# Altium PCB EM_Power_V2.PcbDoc (part 1 of 3)
Units mm, origin at the board's own origin, x right, y up, seen from the top; angles counter-clockwise.
Board outline 82 x 56 mm, 2 copper layers (Top Layer, Bottom Layer); 82 components, 61 nets, 273 pads, 201 vias.
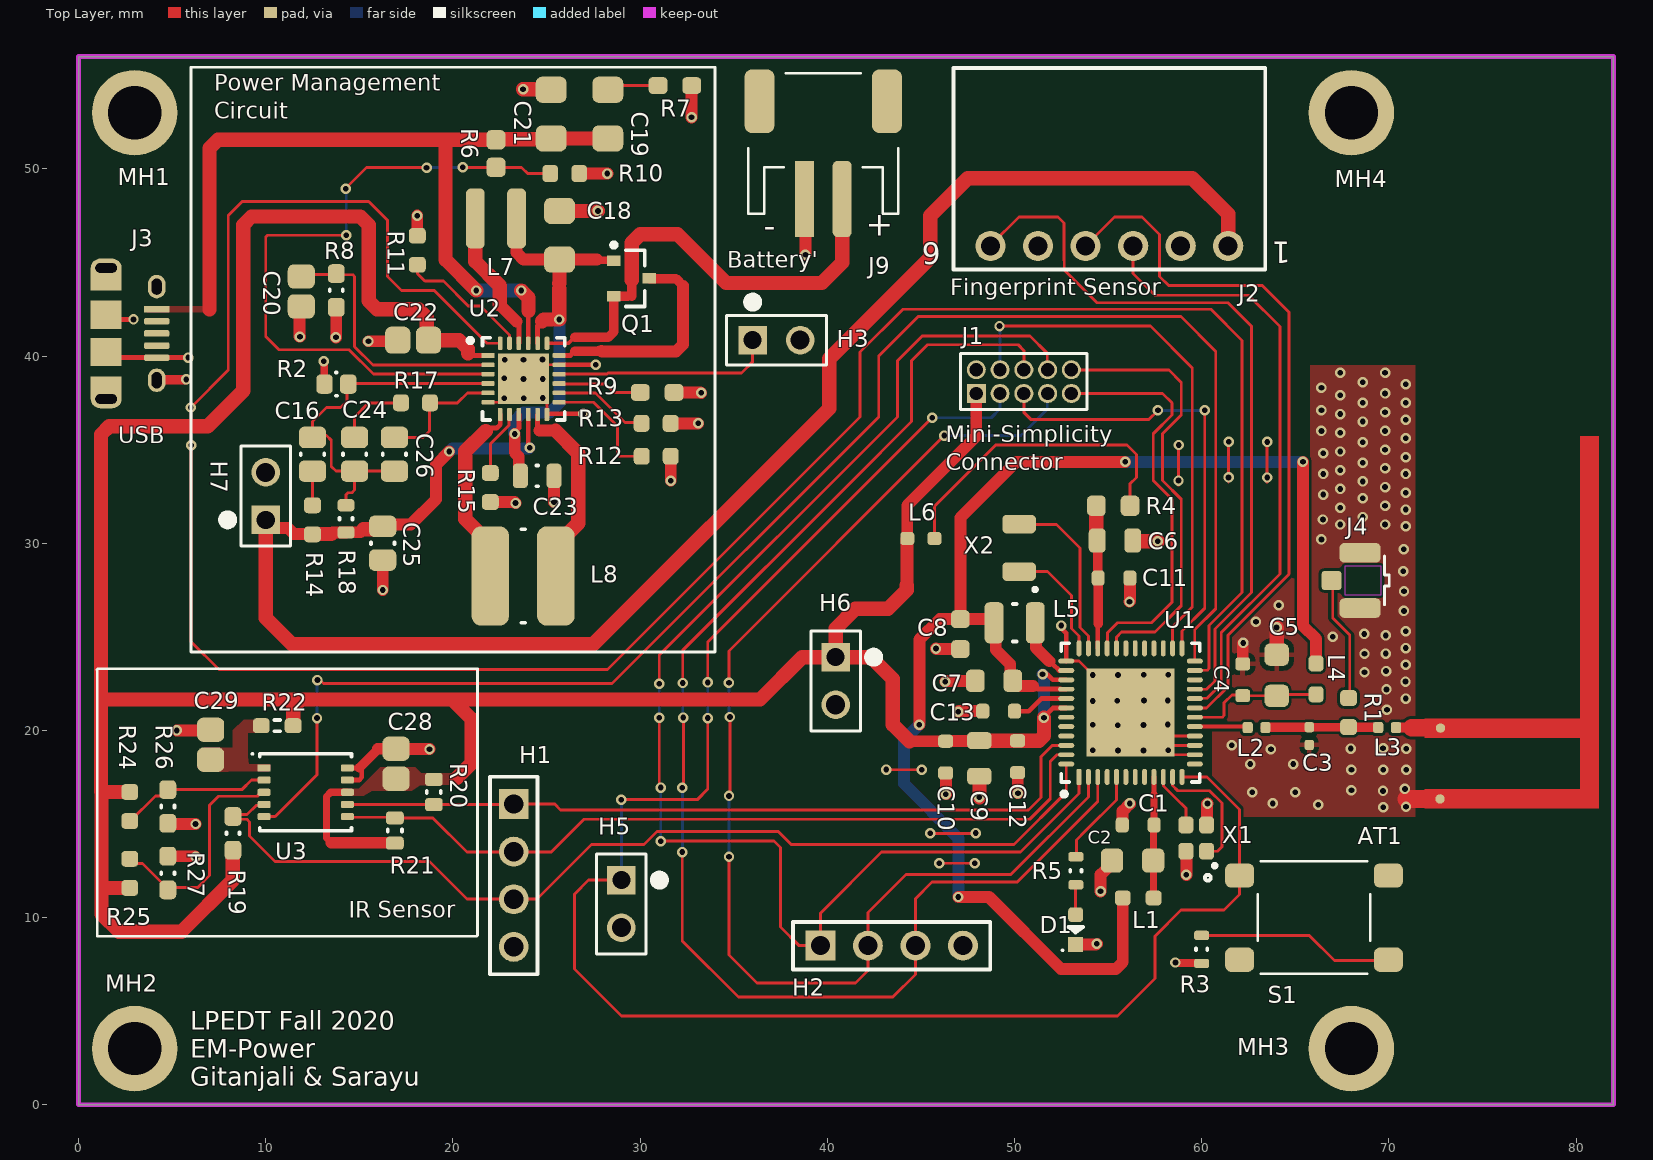
[diagram p0: Top Layer view]
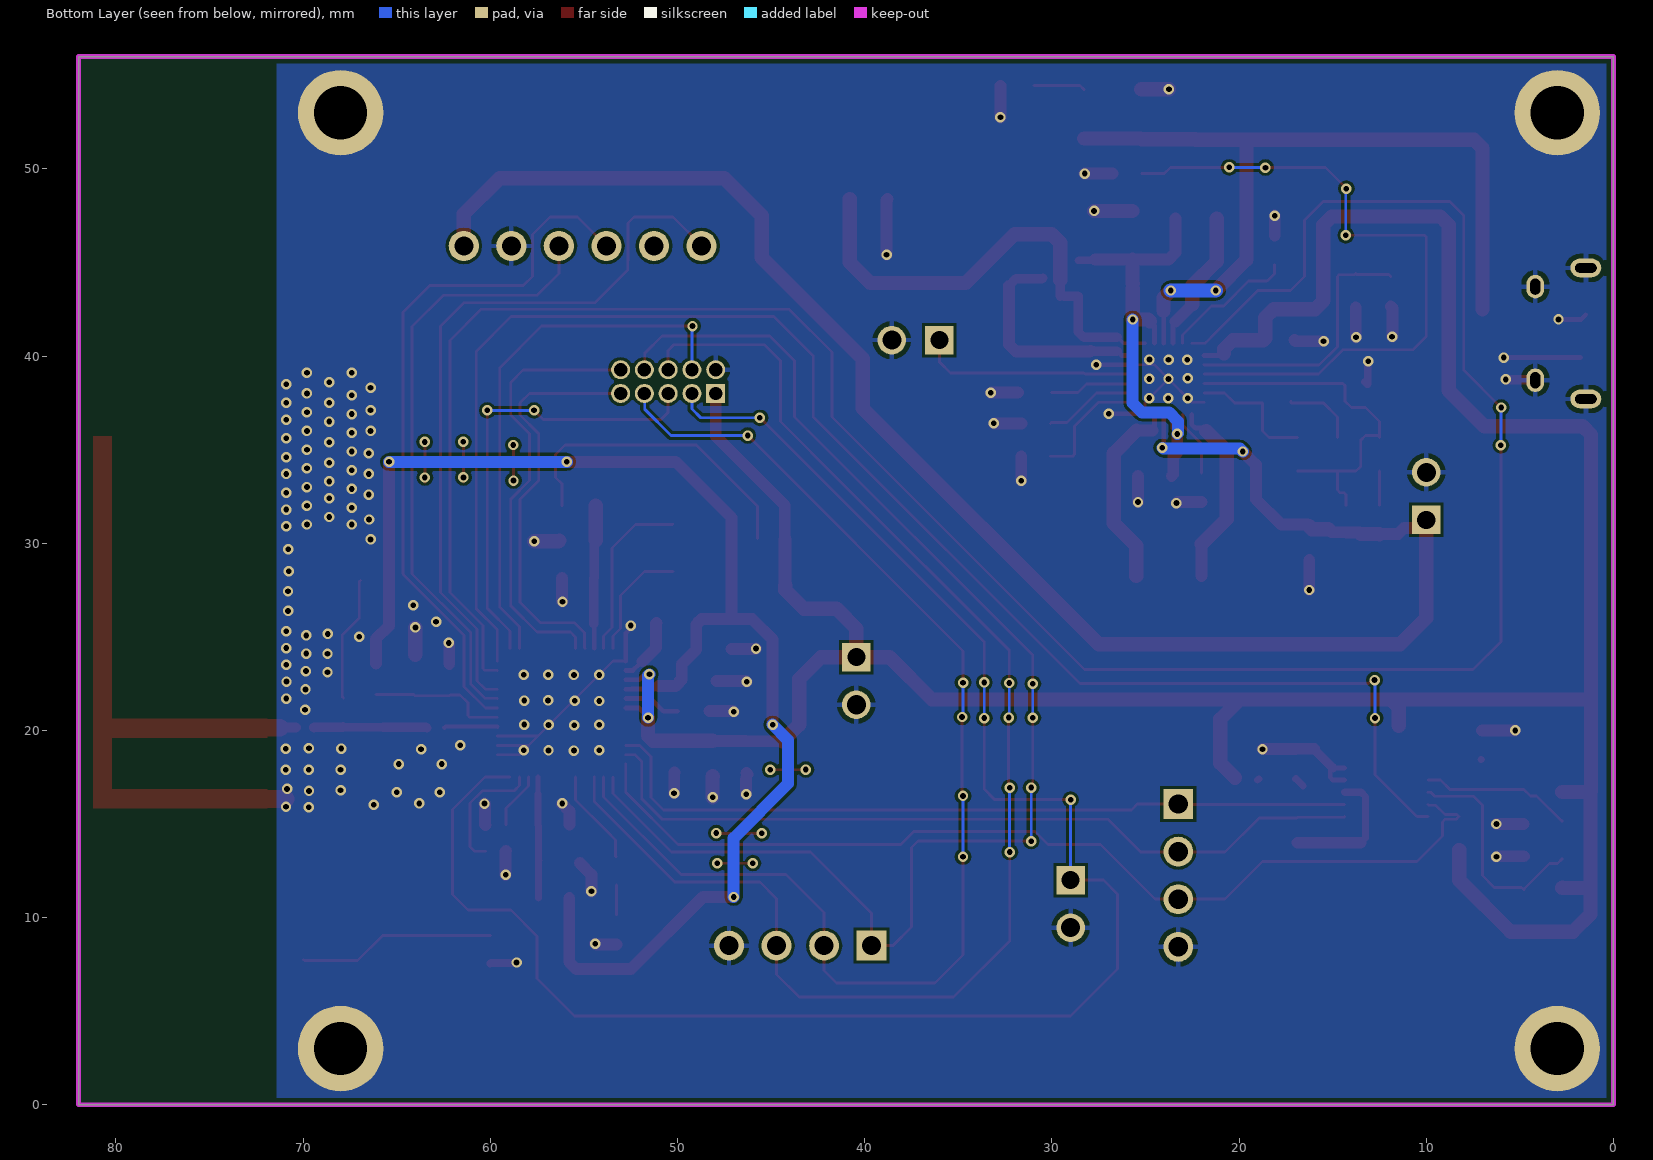
[diagram p1: Bottom Layer view, seen from below]
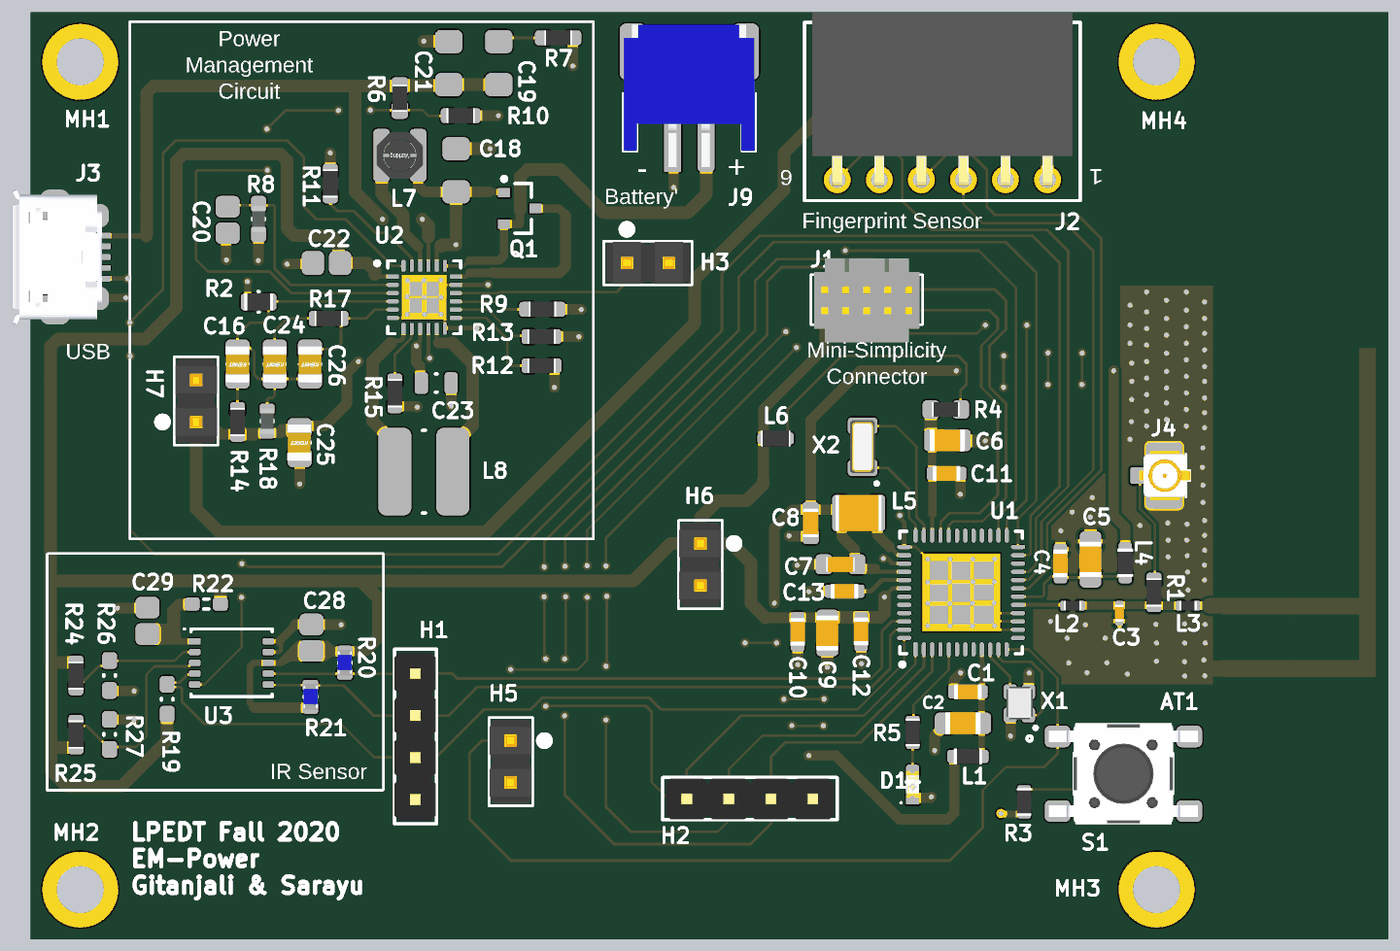
[diagram p3: 3D render of the assembled board from above, using the file's embedded part models]

## Layer stack, top to bottom
Top Solder: solder mask 0.0102, Solder Resist, Dk 3.5
Top Layer: signal copper 0.0356
Dielectric 1: dielectric 0.32, FR-4, Dk 4.8
Bottom Layer: signal copper 0.0356
Bottom Solder: solder mask 0.0102, Solder Resist, Dk 3.5

## Board outline
0,0 82,0 82,56 0,56

## Design rules (kind name [scope] priority, off if disabled: settings)
BoardOutlineClearance [All] p1: gap=0.381 ignorepadtopadclearanceinfootprint=FALSE
Clearance [All] p1: gap=0.152 ignorepadtopadclearanceinfootprint=FALSE
HoleSize [All] p1: absolutevalues=TRUE maxlimit=3.556 minlimit=0.025 maxpercent=80.000 minpercent=20.000
MinimumSolderMaskSliver [All] p1: minsoldermaskwidth=0.102
PolygonConnect GndPolygon [IsNamedPolygon('GND_L02_P005') vs HasFootprint('HOLE_#4')] p1: connectstyle=Direct reliefconductorwidth=0.254 reliefentries=4 polygonreliefangle="90 Angle" airgapwidth=0.254
PolygonConnect TopLayerPolygon [IsNamedPolygon('+3V3_IR_L01_P000') or IsNamedPolygon('+3V3_LDO_L01_P001') or IsNamedPolygon('+3V3_LDO_L01_P002') or IsNamedPolygon('VBUS_L01_P003') or IsNamedPolygon('GND_L01_P011')] p2: connectstyle=Direct reliefconductorwidth=0.254 reliefentries=4 polygonreliefangle="90 Angle" airgapwidth=0.254
PolygonConnect [All] p3: thpad.connectstyle=Relief thpad.reliefconductorwidth=0.254 thpad.reliefentries=4 thpad.polygonreliefangle="90 Angle" thpad.airgapwidth=0.254 smdpad.connectstyle=Relief smdpad.reliefconductorwidth=0.254 smdpad.reliefentries=4 smdpad.polygonreliefangle="90 Angle" smdpad.airgapwidth=0.254 via.connectstyle=Direct via.reliefconductorwidth=0.254 via.reliefentries=4 via.polygonreliefangle="90 Angle" via.airgapwidth=0.254
RoutingVias [All] p1: holewidth=0.406 width=0.66 viastyle="Through Hole" minholewidth=0.305 minwidth=0.559 maxholewidth=0.406 maxwidth=0.66
SilkToSolderMaskClearance [IsPad] p1: minsilkscreentomaskgap=0.127 clearancetoexposedcopper=TRUE
SolderMaskExpansion [All] p1: expansion=0.102 istentingtop=FALSE
Width [All] p1: maxlimit=2.54 minlimit=0.152 preferedwidth=0.152
27 further rules are at their usual default settings.

## Components (designator, comment, footprint, x,y, rotation, side; value= is the part's Value field where it differs from the comment)
AT1 "Inverted F Antenna" F-Antenna 72.748,18.232 r270 top net-tie
C1 "100pF, 6.3V, X5R" CAP_X7R_100PF 56.61,14.948 r0 top
C2 "10pF, 50V, C0G" CAP_0805_10PF 56.31,13.048 r180 top
C3 "1.5pF, 50V, C0G" CAP_0402_1.5pF 65.752,19.698 r270 top
C4 "220nF, 16V, X7R" CAP_X7R_100PF 62.196,22.704 r270 top
C5 "10pF, 50V, C0G" CAP_0805_10PF 64.01,22.948 r90 top
C6 "10µF, 6.3V, X5R" CAP_X5R_10UF 55.368,30.141 r180 top
C7 "4.7µF, 6.3V, X7R" CAP_X7R_4.7uF 48.91,22.648 r180 top
C8 "100nF, 16V, X7R" CAP_X7R_100NF 47.11,25.148 r90 top
C9 "10µF, 6.3V, X5R" CAP_X5R_10UF 48.121,18.504 r270 top
C10 "1µF, 25V, X7R" CAP_X7R_100PF 46.325,18.572 r90 top
C11 "10nF, 16V, X7R" CAP_X7R_100PF 55.318,28.141 r180 top
C12 "1µF, 25V, X7R" CAP_X7R_100PF 50.163,18.596 r90 top
C13 "1µF, 25V, X7R" CAP_X7R_100PF 49.156,21.028 r0 top
C16 "33pF, 50V, C0G" CAPC2012X09N_39P 12.5,34.75 r90 top
C18 "10µF, 25V, X5R" CAP_2012X14 25.7,46.45 r90 top
C19 "10µF, 16V, X5R" CAP_2012X14 28.275,52.923 r90 top
C20 "0.1µF, 16 V, X7R" CAPC2012X14N 11.9,43.45 r270 top
C21 "10µF, 16V, X5R" CAP_2012X14 25.251,52.923 r90 top
C22 "1µF, 10V, X5R" CAPC2012X14N_1 17.875,40.85 r180 top
C23 "2.2µF, 6.3V, X5R" CAPC2012X14N_2_2 24.5,33.6 r180 top
C24 "330pF, 50V, C0G" CAPC2012X09N_39P 14.75,34.75 r90 top
C25 "22µF, 4V, X5R" CAPC2012X14N_22 16.25,30 r90 top
C26 "0.1µF, 50V, C0G" CAPC2012X09N_39P 16.875,34.75 r90 top
C28 "1µF, 6.3V, X5R" CAPC2012X14N 16.964,18.22 r90 top
C29 "1µF, 6.3V, X5R" CAPC2012X14N 7.058,19.236 r90 top
D1 "RED LED" LED_0603_GRN_WL-SMCW 53.269,9.352 r90 top
H1 "0.1\" M Header" 4-PIN_MALE_HEADER_01-IN 23.25,12.25 r270 top
H2 "0.1\" M Header" 4-PIN_MALE_HEADER_01-IN 43.44,8.5 r0 top
H3 "0.1\" M Header" 77311-118-02LF_AMP 36.014,40.85 r180 top
H5 "0.1\" M Header" 77311-118-02LF_AMP 29,12 r90 top
H6 "0.1\" M Header" 77311-118-02LF_AMP 40.449,23.91 r90 top
H7 "0.1\" M Header" 77311-118-02LF_AMP 10,31.25 r270 top
J1 "FTSH-105-01-L-D-K" SAMTEC_FTSH-105-01-L-D-K 50.5,38.635 r0 top
J2 "PPTC061LGBN-RC" SAMTEC-SSQ-106-02-X-S-RA 55.068,51.657 r180 top
J3 "micro-USB" micro-USB 1.477,41.207 r270 top
J4 "U.FL-R-SMT(10)" U.FL_connector 68.465,28.011 r270 top
J9 "S2B-PH-SM4-TB" S2B-PH-SM4-TB 39.782,52.13 r0 top
L1 "Ferrite, 600 Ohms @ 100MHz" Ferrite_Bead_0603 56.61,11.048 r0 top
L2 "1.9nH, 220mA, 300mOhm" INDC1005X04N_1.9NH 62.932,20.149 r0 top
L3 "1.9nH, 220mA, 300mOhm" INDC1005X04N_1.9NH 69.905,20.149 r0 top
L4 "Ferrite, 600 Ohms @ 100MHz" Ferrite_Bead_0603 66.11,22.748 r270 top
L5 "4.7µH, 280mA, 143mOhms" IND_2228x1 50.01,25.748 r180 top
L6 "Ferrite, 1k @ 100MHz" Ferrite_Bead_1801x1 45,30.25 r180 top
L7 "3.3µH, 1.8A, 101mOhm" IND_2828x30 22.3,47.35 r0 top
L8 "2.2µH, 2.35A, 28mOhm" INDP4848X30N_2_2 23.75,28.25 r0 top
MH1 "#4 Hole" HOLE_#4 3,53 r0 top
MH2 "#4 Hole" HOLE_#4 3,3 r0 top
MH3 "#4 Hole" HOLE_#4 68,3 r0 top
MH4 "#4 Hole" HOLE_#4 68,53 r0 top
Q1 "SI2333DS-T1-E3" SOT95P237X112-3N 29.55,44.15 r0 top
R1 "0 Ohm" RES_0_0603 67.848,20.957 r90 top
R2 "1k" RESC1609X05N 13.775,38.5 r0 top
R3 "3.3k" RES_0603_3.3k 60,8.3 r90 top
R4 "1 Ohm" RES_0603_10k 55.275,32.001 r180 top
R5 "3.3k" RES_0603_3.3k 53.28,12.5 r270 top
R6 "100k" RESC1607X60N 22.3,50.815 r90 top
R7 "1 Ohm" RESC1508X06N 31.859,54.449 r180 top
R8 "3.01k" RESC1608X06N_3K01 13.767,43.504 r90 top
R9 "2k" RESC1508X06N 30.912,38.054 r180 top
R10 "0 Ohm" RES_0_0603 25.975,49.75 r180 top
R11 "0 Ohm" RES_0_0603 18.1,45.65 r270 top
R12 "0 Ohm" RES_0_0603 30.86,34.646 r180 top
R13 "0 Ohm" RES_0_0603 30.855,36.403 r180 top
R14 "0 Ohm" RES_0_0603 12.5,31.25 r270 top
R15 "0 Ohm" RES_0_0603 22,32.975 r90 top
R17 "0 Ohm" RES_0_0603 18,37.5 r180 top
R18 "5.23k" RES_0603_C1508X06N 14.288,31.303 r270 top
R19 "10k" RESC1508X06N_10K 8.25,14.5 r270 top
R20 "4.7k" RESC1608X06N_4_7 18.981,16.709 r90 top
R21 "4.7k" RESC1608X06N_4_7 16.9,14.65 r270 top
R22 "330 Ohm" RESC1608X06N_330 10.614,20.252 r0 top
R24 "0 Ohm" RES_0_0603 2.74,15.934 r90 top
R25 "0 Ohm" RES_0_0603 2.74,12.365 r270 top
R26 "10k" RESC1508X06N_10K 4.772,15.934 r90 top
R27 "10k" RESC1508X06N_10K 4.772,12.378 r270 top
S1 "TACTILE SWITCH" SW_PTS645SK50SMTR92LFS 66,10 r0 top
U1 "EFR32BG12P433F1024GM48-CR" QFN50P700X700X90_HS-49N 56.2,20.95 r90 top
U2 "LTC3566EUF#PBF" QFN50P400X400X80_HS 23.775,38.781 r0 top
U3 "AK9753AE" SON65P460X114-10N 12.138,16.696 r0 top
X1 "38.4MHz" OSCSC220P320X250X70-4N 59.71,14.248 r90 top
X2 "32.768kHz" XTAL320X150X90 50.25,29.75 r90 top

## Footprints (in the part's own frame and the unit in brackets; to place one, negate y for a bottom-side part, rotate by r counter-clockwise, add the part's x,y. Pads: shape width x height; smd on the part's side, far side on the other; paste and mask are expansions set on the pad)
4-PIN_MALE_HEADER_01-IN [mm] "Assembly .025\" [.64] SQ Post Terminal Strip, 1x4 Pins, Vertical, 2.54mm Pitch, Male"
  rect 1.6x1.6 hole 1.02: 1(-3.81,0)
  round 1.6 hole 1.02: 2(-1.27,0) 3(1.27,0) 4(3.81,0)
  silkscreen extent -5.27,-1.27 5.27,1.27, body extent -5.08,-1.27 5.08,1.22, height 8.54
77311-118-02LF_AMP [mil]
  rect 60x60 hole 38 mask+0: 1(0,0)
  round 60 hole 40 mask+0: 2(-100,0)
  silkscreen extent -155,-90 55,52, body extent -150,-50 50,50, height 350
CAP_0402_1.5pF [mm] "CAP CER 1.5PF 50V C0G/NP0 0402"
  rrect50% 0.55x0.5 smd: 1(-0.475,0) 2(0.475,0)
  body extent -0.53,-0.27 0.53,0.28, height 0.55
CAP_0805_10PF [mm] "CAP CER 10PF 50V C0G/NP0 0805"
  rrect50% 1.2x1.3 smd: 1(-1.1,0) 2(1.1,0)
  body extent -1.07,-0.67 1.08,0.67, height 0.7
CAP_2012X14 [mm] "Chip Capacitor, 2-Leads, Body 2.00x1.25mm, IPC Medium Density"
  rrect50% 1.4x1.65 smd: 1(-1.3,0) 2(1.3,0)
  body extent -1.07,-0.7 1.07,0.7, height 1.4
CAP_X5R_10UF [mm] "CAP CER 10UF 6.3V X5R 0805"
  rrect50% 0.9x1.3 smd: 1(-0.95,0) 2(0.95,0)
  body extent -1.07,-0.67 1.08,0.67, height 1.35
CAP_X7R_4.7uF [mm] "CAP CER 4.7UF 6.3V X7R 0603"
  rrect50% 1x1.2 smd: 1(-1,0) 2(1,0)
  body extent -0.87,-0.48 0.88,0.48, height 0.95
CAP_X7R_100NF [mm] "CAP CER 0.1UF 16V X7R 0603"
  rrect50% 0.95x1 smd: 1(-0.8,0) 2(0.8,0)
  body extent -0.87,-0.48 0.88,0.48, height 0.95
CAP_X7R_100PF [mm] "CAP CER 100PF 16V X7R 0603"
  rrect50% 0.7x0.8 smd: 1(-0.85,0) 2(0.85,0)
  body extent -0.85,-0.45 0.85,0.45, height 0.87
CAPC2012X09N_39P [mm] "39pF, Chip Capacitor, 2-Leads, Body 2.00x1.25mm, IPC Medium Density"
  rrect50% 1.15x1.45 smd: 1(-0.9,0) 2(0.9,0)
  silkscreen extent -0.05,-0.63 0.05,0.63, body extent -1.13,-0.73 1.07,0.73, height 0.88
CAPC2012X14N [mm] "Chip Capacitor, 2-Leads, Body 2.00x1.25mm, IPC Medium Density"
  rrect50% 1.3x1.45 smd mask+0.09: 1(-0.8,0) 2(0.8,0)
  body extent -1.1,-0.72 1.1,0.72, height 1.45
CAPC2012X14N_1 [mm] "Chip Capacitor, 2-Leads, Body 2.01x1.25mm, IPC Medium Density"
  rrect50% 1.35x1.45 smd mask+0.08: 1(-0.825,0) 2(0.825,0)
  body extent -1.1,-0.72 1.11,0.72, height 1.4
CAPC2012X14N_2_2 [mm] "2.2uF, Chip Capacitor, 2-Leads, Body 2.00x1.25mm, IPC Medium Density"
  rrect50% 0.8x1.3 smd: 1(-0.9,0) 2(0.9,0)
  silkscreen extent -0.05,-0.55 0.05,0.55, body extent -1.08,-0.67 1.07,0.68, height 1.35
CAPC2012X14N_22 [mm] "22uF, Chip Capacitor, 2-Leads, Body 2.00x1.25mm, IPC Medium Density"
  rrect50% 1.15x1.45 smd: 1(-0.9,0) 2(0.9,0)
  silkscreen extent -0.05,-0.63 0.05,0.63, body extent -1.1,-0.7 1.1,0.75, height 1.4
F-Antenna [mm]
  round 0.5 smd paste-2 mask-2: 1(1.892,-0.012) 2(-1.891,0.013)
  Top Layer region: 2.392,-0.818 2.392,8.478 -17.471,8.478 -17.471,7.488 -2.399,7.488 -2.399,-0.818 -1.383,-0.818 -1.383,7.488 1.376,7.488 1.376,-0.818
Ferrite_Bead_0603 [mm] "FERRITE BEAD 600 OHM 0603 1LN"
  rrect50% 0.85x0.8 smd: 1(-0.825,0) 2(0.825,0)
  body extent -0.87,-0.48 0.88,0.48, height 0.95
Ferrite_Bead_1801x1 [mm] "FERRITE BEAD 1 KOHM 0603 1LN"
  rrect50% 0.75x0.7 smd: 1(-0.725,0) 2(0.725,0)
  body extent -0.9,-0.5 0.9,0.5, height 1
HOLE_#4 [mil]
  round 180 hole 112: 1(0,0)
IND_2228x1 [mm] "Shielded Multilayer Inductor 143mOhm Max 1008 (2520 Metric)"
  rrect50% 1x2.2 smd: 1(-1.1,0) 2(1.1,0)
  silkscreen extent -0.1,-1 0.1,1, body extent -1.4,-1.1 1.4,1.1, height 1
IND_2828x30 [mm] "Precision Wire Wound Inductor, 2-Leads, Body 2.80x2.80mm, IPC Medium Density"
  rrect50% 1x3.2 smd: 1(-1.1,0) 2(1.1,0)
  body extent -1.4,-1.4 1.4,1.4, height 2.8
INDC1005X04N_1.9NH [mm] "Chip Inductor, 2-Leads, Body 1.00x0.50mm, IPC Medium Density"
  rrect50% 0.55x0.6 smd: 1(-0.475,0) 2(0.475,0)
  body extent -0.55,-0.3 0.55,0.3, height 0.45
INDP4848X30N_2_2 [mm] "2.2uH, Precision Wire Wound Inductor, 2-Leads, Body 4.80x4.80mm, IPC Medium Density"
  rrect50% 2x5.3 smd: 1(-1.75,0) 2(1.75,0)
  silkscreen extent -0.1,-2.5 0.1,2.5, body extent -2.5,-2.5 2.5,2.5, height 3
LED_0603_GRN_WL-SMCW [mm] "SODFL, 2-Leads, Body 0.80x1.80mm, IPC Medium Density"
  rrect50% 0.8x0.8 smd: 1(0.8,0)
  rect 0.8x0.8 smd: 2(-0.8,0)
  silkscreen extent -1.15,-0.4 0.15,0.75, body extent -0.8,-0.4 0.8,0.4, height 0.71
micro-USB [mm] "microUSB paste-in-pad"
  rect 0.35x1.35 smd mask+0.05: 1(-1.3,2.7)
  rrect50% 0.35x1.35 smd mask+0.05: 2(-0.65,2.7) 3(0,2.7) 4(0.65,2.7) 5(1.3,2.7)
  oval 1.25x0.95 hole 0.55 slot 0.85 at 0 deg mask+0.076: S1(-2.5,2.7) S2(2.5,2.7)
  rrect100% 1x1.65 hole 0.5 slot 1.15 at 90 deg mask+0.076: S3(-3.5,0) S6(3.5,0)
  rect 1.2x1.65 smd mask+0.076: S3(-2.896,0) S6(2.896,0)
  rect 1.5x1.65 smd mask+0.076: S4(-1,0) S5(1,0)
  body extent -4.1,-2.58 4.1,2.85, height 2.71
OSCSC220P320X250X70-4N [mm]
  rrect50% 0.9x0.8 smd mask+0.089: 1(-0.7,-0.55) 2(0.7,-0.55) 3(0.7,0.55) 4(-0.7,0.55)
  silkscreen extent -1.57,-1.08 -1.37,-0.88, body extent -0.98,-0.82 1.02,0.78, height 0.45
QFN50P400X400X80_HS [mm] "QFN, 24-Leads, Body 4.00x4.00mm, Pitch 0.50mm, Thermal Pad 2.70x2.70mm, IPC Medium Density"
  rect 0.7x0.25 smd mask+0.04: 1(-1.9,1.25)
  rrect50% 0.7x0.25 smd mask+0.04: 2(-1.9,0.75) 3(-1.9,0.25) 4(-1.9,-0.25) 5(-1.9,-0.75) 6(-1.9,-1.25) 13(1.9,-1.25) 14(1.9,-0.75) 15(1.9,-0.25) 16(1.9,0.25) 17(1.9,0.75) 18(1.9,1.25)
  rrect50% 0.25x0.7 smd mask+0.04: 7(-1.25,-1.9) 8(-0.75,-1.9) 9(-0.25,-1.9) 10(0.25,-1.9) 11(0.75,-1.9) 12(1.25,-1.9) 19(1.25,1.9) 20(0.75,1.9) 21(0.25,1.9) 22(-0.25,1.9) 23(-0.75,1.9) 24(-1.25,1.9)
  rect 2.7x2.7 smd paste-2 mask+0.04: 25(-0.004,-0.004)
  silkscreen extent -2.97,-2.2 2.2,2.2, body extent -2.05,-2.05 2.05,2.05, height 0.8
QFN50P700X700X90_HS-49N [mm] "QFN, 48-Leads, Body 7.00x7.00mm, Pitch 0.50mm, Thermal Pad 4.70x4.70mm, IPC Medium Density"
  rect 4.7x4.7 smd paste-2.54: 0(0,0)
  rrect50% 0.86x0.26 smd mask+0.045: 1(-3.435,2.75)
  oval 0.86x0.26 smd mask+0.045: 2(-3.435,2.25) 3(-3.435,1.75) 4(-3.435,1.25) 5(-3.435,0.75) 6(-3.435,0.25) 7(-3.435,-0.25) 8(-3.435,-0.75) 9(-3.435,-1.25) 10(-3.435,-1.75) 11(-3.435,-2.25) 12(-3.435,-2.75) 25(3.435,-2.75) 26(3.435,-2.25) 27(3.435,-1.75) 28(3.435,-1.25) 29(3.435,-0.75) 30(3.435,-0.25) 31(3.435,0.25) 32(3.435,0.75) 33(3.435,1.25) 34(3.435,1.75) 35(3.435,2.25) 36(3.435,2.75)
  oval 0.26x0.86 smd mask+0.045: 13(-2.75,-3.435) 14(-2.25,-3.435) 15(-1.75,-3.435) 16(-1.25,-3.435) 17(-0.75,-3.435) 18(-0.25,-3.435) 19(0.25,-3.435) 20(0.75,-3.435) 21(1.25,-3.435) 22(1.75,-3.435) 23(2.25,-3.435) 24(2.75,-3.435) 37(2.75,3.435) 38(2.25,3.435) 39(1.75,3.435) 40(1.25,3.435) 41(0.75,3.435) 42(0.25,3.435) 43(-0.25,3.435) 44(-0.75,3.435) 45(-1.25,3.435) 46(-1.75,3.435) 47(-2.25,3.435) 48(-2.75,3.435)
  silkscreen extent -4.47,-3.7 3.7,3.7, body extent -3.55,-3.55 3.55,3.55, height 0.9
RES_0_0603 [mm] "RES SMD 0 OHM JUMPER 1/10W 0603"
  rrect50% 0.85x0.9 smd: 1(-0.775,0) 2(0.775,0)
  body extent -0.85,-0.45 0.85,0.45, height 0.55
RES_0603_3.3k [mm] "RES SMD 3.3 KOHM 1% 0.3W 0603"
  rrect50% 0.5x0.8 smd: 1(-0.75,0) 2(0.75,0)
  silkscreen extent -0.05,-0.3 0.05,0.3, body extent -0.85,-0.45 0.85,0.45, height 0.55
RES_0603_10k [mm] "RES SMD 10K OHM 1% 1/16W 0603"
  rrect50% 1x1.1 smd: 1(-0.9,0) 2(0.9,0)
  body extent -0.82,-0.45 0.83,0.45, height 0.55
RES_0603_C1508X06N [mm] "5.23k ohm, Chip Resistor, 2-Leads, Body 1.55x0.80mm, IPC Medium Density"
  rrect50% 0.65x0.9 smd: 1(-0.725,0) 2(0.725,0)
  silkscreen extent -0.05,-0.35 0.05,0.35, body extent -0.78,-0.4 0.78,0.4, height 0.44
RESC1508X06N [mm] "2k ohm, Chip Resistor, 2-Leads, Body 1.55x0.80mm, IPC Medium Density"
  rrect50% 1x0.9 smd: 1(-0.9,0) 2(0.9,0)
  body extent -0.82,-0.45 0.82,0.45, height 0.55
RESC1508X06N_10K [mm] "10k ohm, Chip Resistor, 2-Leads, Body 1.55x0.80mm, IPC Medium Density"
  rrect50% 1x0.9 smd: 1(-0.9,0) 2(0.9,0)
  silkscreen extent -0.05,-0.35 0.05,0.35, body extent -0.82,-0.45 0.82,0.45, height 0.55
RESC1607X60N [mm]
  rrect50% 1.04x1.02 smd: 1(-0.735,0) 2(0.735,0)
  body extent -0.82,-0.45 0.83,0.45, height 0.55
RESC1608X06N_3K01 [mm] "3.01k, Chip Resistor, 2-Leads, Body 1.55x0.80mm, IPC Medium Density"
  rrect50% 1x0.9 smd: 1(-0.9,0) 2(0.9,0)
  silkscreen extent -0.05,-0.35 0.05,0.35, body extent -0.78,-0.4 0.78,0.4, height 0.44
RESC1608X06N_4_7 [mm] "4.7k ohm, Chip Resistor, 2-Leads, Body 1.55x0.85mm, IPC Medium Density"
  rrect50% 0.7x0.95 smd: 1(-0.675,0) 2(0.675,0)
  silkscreen extent -0.05,-0.38 0.05,0.38, body extent -0.78,-0.42 0.78,0.43, height 0.45
RESC1608X06N_330 [mm] "330 ohm, Chip Resistor, 2-Leads, Body 1.60x0.80mm, IPC Medium Density"
  rrect50% 0.9x0.8 smd: 1(-0.85,0) 2(0.85,0)
  silkscreen extent -0.15,-0.3 0.15,0.3, body extent -0.85,-0.45 0.85,0.45, height 0.55
RESC1609X05N [mm] "1k ohm, Chip Resistor, 2-Leads, Body 1.60x0.90mm, IPC Medium Density"
  rrect50% 0.88x1.03 smd: 1(-0.635,0) 2(0.635,0)
  silkscreen extent -0.04,-0.63 0.04,0.63, body extent -0.87,-0.52 0.87,0.52, height 0.51
S2B-PH-SM4-TB [mil]
  rect 40x160 smd: 1(-39.44,-147.2)
  rrect50% 40x160 smd: 2(39.93,-147.2)
  rrect50% 63x134 smd: NC1(-133.93,58.46) NC2(133.93,58.46)
  silkscreen extent -158,-179 158,117, body extent -156,-216 155,123, height 220
SAMTEC-SSQ-106-02-X-S-RA [mm]
  round 1.62 / inner round 1.524 / far side round 1.62 hole 1.02: 1(-6.35,5.778) 2(-3.81,5.778) 3(-1.27,5.778) 4(1.27,5.778) 5(3.81,5.778) 6(6.35,5.778)
  silkscreen extent -8.32,-3.72 8.32,7.04, body extent -7.87,-4.32 7.87,6.14, height 2.57
SAMTEC_FTSH-105-01-L-D-K [mil]
  rect 40x40 hole 28 mask+2: 1(-100,-25)
  round 40 hole 28 mask+2: 2(-100,25) 3(-50,-25) 4(-50,25) 5(0,-25) 6(0,25) 7(50,-25) 8(50,25) 9(100,-25) 10(100,25)
  silkscreen extent -133,-59 133,59, body extent -125,-102 125,98, height 225
SON65P460X114-10N [mm] "SON, 10-Leads, Body 3.80x4.60mm, Pitch 0.65mm, IPC Medium Density"
  rect 0.7x0.38 smd mask+0.08: 1(-2.225,1.3)
  rrect50% 0.7x0.38 smd mask+0.08: 2(-2.225,0.65) 3(-2.225,0) 4(-2.225,-0.65) 5(-2.225,-1.3) 6(2.225,-1.3) 7(2.225,-0.65) 8(2.225,0) 9(2.225,0.65) 10(2.225,1.3)
  silkscreen extent -2.9,-2.05 2.45,2.1, body extent -2.3,-1.9 2.3,1.9, height 1.14
SOT95P237X112-3N [mm] "SOT23, 3-Leads, Body 2.92x2.37mm, Pitch 0.95mm, IPC Medium Density"
  rect 0.724x0.559 smd: 1(-0.95,0.95) 2(-0.95,-0.95) 3(0.95,0)
  silkscreen extent -1.07,-1.5 0.7,1.9, body extent -0.7,-1.52 0.7,1.52, height 1.12
SW_PTS645SK50SMTR92LFS [mm]
  rrect50% 1.55x1.3 smd: 1(-3.975,2.25) 2(3.975,2.25) 3(-3.975,-2.25) 4(3.975,-2.25)
  silkscreen extent -5.83,-3 3,3, body extent -4.5,-3 4.5,3, height 5.1
U.FL_connector [mm]
  rrect25% 1x1.05 smd: FEED(0,-1.525)
  rrect50% 1.05x2.2 smd: G1(-1.475,0) G2(1.475,0)
  Top Layer keep-out region: -0.762,-0.819 0.762,-0.819 0.762,1.137 -0.762,1.137
  silkscreen extent -1.3,1.3 1.3,1.55, body extent -1.5,-1.51 1.5,1.59, height 1.25
XTAL320X150X90 [mm]
  rrect50% 1x1.8 smd: 1(-1.269,0) 2(1.269,0)
  silkscreen extent -2.32,-0.95 -2.12,-0.75, body extent -1.6,-0.75 1.6,0.75, height 0.8

## Part data
AT1: library part F_ANTENNA
C1: library part 885012206028, "100 pF, 16 V, 0603 [1608 Metrické], ± 10%, X7R", Capacitance=100pF, Case Code (Imperial)=0603, Case Code (Metric)=1608, Manufacturer="Wurth Electronics", Max Operating Temperature=125°C, Min Operating Temperature=-55°C, Supplier Part Number 1=732-7947-1-ND, Tolerance=10%, Voltage Rating=16V, Case/Package=0603, Category="Ceramic Capacitors", ComponentLink1Description=http://www.farnell.com/datasheets/2546812.pdf?src-supplier=Farnell, ComponentLink1URL=http://www.farnell.com/datasheets/2546812.pdf?src-supplier=Farnell, ComponentLink2Description=http://katalog.we-online.de/pbs/datasheet/885012206028.pdf?src-supplier=Digi-Key, ComponentLink2URL=http://katalog.we-online.de/pbs/datasheet/885012206028.pdf?src-supplier=Digi-Key, ComponentLink3Description=https://katalog.we-online.de/pbs/datasheet/885012206028.pdf?src-supplier=Digi-Key, ComponentLink3URL=https://katalog.we-online.de/pbs/datasheet/885012206028.pdf?src-supplier=Digi-Key, Length=0.063inch, Manufacturer Part Number=885012206028, Mount="Surface Mount", Packaging="Tape and Reel", Pricing 1="1=0.10000, 10=0.02100, 100=0.01920, 500=0.01698 (USD)", RoHS=Yes, Stock 1=1513, Supplier 1=Digi-Key, Thickness=0.034inch, Width=0.031inch
C2 C5: library part VJ0805A100JXACW1BC, "CERAMIC CAP 10PF 50V, C0G, 5%, 0805", Capacitance=10pF, Case Code (Imperial)=0805, Case Code (Metric)=2012, Dielectric=C0G, Dielectric Material=Tantalum, Manufacturer=Vishay, Max Operating Temperature=125°C, Min Operating Temperature=-55°C, Package Quantity=4000, Supplier Part Number 1=720-1625-1-ND, Temperature Coefficient=0ppm/°C, Tolerance=5%, Voltage Rating=50V, Case/Package=0805, Category="Ceramic Capacitors", ComponentLink1Description=https://datasheet.ciiva.com/8063/1760306-8063331.pdf?src-supplier=Element14, ComponentLink1URL=https://datasheet.ciiva.com/8063/1760306-8063331.pdf?src-supplier=Element14, ComponentLink2Description=https://datasheet.ciiva.com/176/vjw1bcbascomseries-176727.pdf?src-supplier=Digi-Key, ComponentLink2URL=https://datasheet.ciiva.com/176/vjw1bcbascomseries-176727.pdf?src-supplier=Digi-Key, ComponentLink3Description=https://datasheet.ciiva.com/11486/vjw1bcbascomseries-11486214.pdf?src-supplier=Avnet, ComponentLink3URL=https://datasheet.ciiva.com/11486/vjw1bcbascomseries-11486214.pdf?src-supplier=Avnet, ComponentLink4Description=https://datasheet.ciiva.com/16201/vjw1bcbascomseries-16201004.pdf?src-supplier=Future+Electronics, ComponentLink4URL=https://datasheet.ciiva.com/16201/vjw1bcbascomseries-16201004.pdf?src-supplier=Future+Electronics, Depth=1.25mm, Height=1.45mm, Lead Free="Lead Free", Length=2mm, Manufacturer Part Number=VJ0805A100JXACW1BC, Mount="Surface Mount", Number of Pins=2, Packaging="Tape and Reel", Pricing 1="1=0.20000, 10=0.14000, 50=0.07940, 100=0.06580, 500=0.04614, 1000=0.03819 (USD)", REACH SVHC=Unknown, RoHS=Yes, Stock 1=4065, Supplier 1=Digi-Key, Termination=SMD/SMT, Thickness=0.03inch, Voltage Rating (DC)=50V, Width=0.049inch
C3: library part GJM1555C1H1R5WB01D, "Cap Ceramic 1.5pF 50V C0G 0.05pF SMD 0402 125C Paper T/R", Capacitance=1.5pF, Case Code (Imperial)=0402, Case Code (Metric)=1005, Dielectric=C0G, Manufacturer=Murata, Max Operating Temperature=125°C, Min Operating Temperature=-55°C, Package Quantity=10000, Supplier Part Number 1=490-11199-1-ND, Voltage Rating=50V, Case/Package=0402, Category="Ceramic Capacitors", ComponentLink1Description=https://datasheet.ciiva.com/18183/getdatasheetpartid-312921-18183825.pdf?src-supplier=Verical, ComponentLink1URL=https://datasheet.ciiva.com/18183/getdatasheetpartid-312921-18183825.pdf?src-supplier=Verical, Depth=0.5mm, Height=0.5mm, Lead Free="Lead Free", Length=1mm, Manufacturer Part Number=GJM1555C1H1R5WB01D, Mount="Surface Mount", Packaging="Tape and Reel", Pricing 1="1=0.24000, 10=0.16200, 50=0.10800, 100=0.09180, 500=0.06480, 1000=0.05670, 2500=0.05400, 5000=0.04995 (USD)", Radiation Hardening=No, RoHS=Yes, Stock 1=83250, Supplier 1=Digi-Key, Termination=SMD/SMT, Thickness=0.022inch, Voltage Rating (DC)=50V, Width=0.02inch
C4: library part 885012206048, "220nF/0.22UF, 16V, X7R, 10%, 0603, CERAMIC CAPACITOR ; Product Range:CC Series; Capacitance:0.22 F; Capacitance Tolerance: 10%; Dielectric Characteristic:X7R; Voltage Rating:16V; Ceramic Capacitor Case:0603 ; Packaging:Cut Tape;RoHS Compliant: Yes", Capacitance=220nF, Case Code (Imperial)=0805, Case Code (Metric)=2012, Dielectric=X7R, Dielectric Material=Ceramic, Insulation Resistance=100GR, Manufacturer=Yageo, Manufacturer Part Number=CC0805KRX7R7BB224, Max Operating Temperature=125°C, Min Operating Temperature=-55°C, Supplier Part Number 1=732-7967-1-ND, Tolerance=10%, Voltage=16V, Case/Package=0805, Category="Ceramic Capacitors", ComponentLink1Description=https://datasheet.ciiva.com/8034/1489800-8034021.pdf?src-supplier=Element14, ComponentLink1URL=https://datasheet.ciiva.com/8034/1489800-8034021.pdf?src-supplier=Element14, ComponentLink2Description=https://datasheet.ciiva.com/8034/1489800-8034022.pdf?src-supplier=Element14, ComponentLink2URL=https://datasheet.ciiva.com/8034/1489800-8034022.pdf?src-supplier=Element14, ComponentLink3Description=https://datasheet.ciiva.com/15189/getdatasheetpartid-315919-15189222.pdf?src-supplier=Verical, ComponentLink3URL=https://datasheet.ciiva.com/15189/getdatasheetpartid-315919-15189222.pdf?src-supplier=Verical, ComponentLink4Description=https://datasheet.ciiva.com/16624/upy-gphc-x7r-6-3v-to-50v-8-16624663.pdf?src-supplier=Avnet+Europe, ComponentLink4URL=https://datasheet.ciiva.com/16624/upy-gphc-x7r-6-3v-to-50v-8-16624663.pdf?src-supplier=Avnet+Europe, ComponentLink5Description=https://datasheet.ciiva.com/7978/1489800-7978206.pdf?src-supplier=Element14, ComponentLink5URL=https://datasheet.ciiva.com/7978/1489800-7978206.pdf?src-supplier=Element14, Depth=1.25mm, Halogen Free="Halogen Free", Height=0.85mm, Lead Free="Lead Free", Length=2mm, Material=Ceramic, Mount="Surface Mount", Number of Pins=2, Packaging="Tape and Reel", Pricing 1="1=0.19000, 10=0.13300, 50=0.07560, 100=0.06260, 500=0.04392, 1000=0.03636 (USD)", Radiation Hardening=No, REACH SVHC=Unknown, RoHS=Yes, Stock 1=3851, Supplier 1=Digi-Key, Termination=SMD/SMT, Thickness=0.037inch, Voltage Rating=16V, Width=0.049inch
C6 C9: library part 885012107004, "CAP CER 10UF 6.3V X5R 0805", Capacitance=10uF, Case Code (Imperial)=0805, Case Code (Metric)=2012, Manufacturer="Wurth Electronics", Max Operating Temperature=85°C, Min Operating Temperature=-55°C, Supplier Part Number 1=732-7615-1-ND, Tolerance=20%, Voltage Rating=6.3V, Case/Package=0805, Category="Ceramic Capacitors", ComponentLink1Description=https://katalog.we-online.de/pbs/datasheet/885012107004.pdf?src-supplier=Digi-Key, ComponentLink1URL=https://katalog.we-online.de/pbs/datasheet/885012107004.pdf?src-supplier=Digi-Key, Length=0.079inch, Manufacturer Part Number=885012107004, Mount="Surface Mount", Packaging="Tape and Reel", Pricing 1="1=0.19000, 10=0.17100, 100=0.15310, 500=0.13542, 1000=0.12500 (USD)", RoHS=Yes, Stock 1=10674, Supplier 1=Digi-Key, Thickness=0.053inch, Width=0.049inch
C7: library part CL10B475KQ8NQNC, "4.7uF, 6.3 V, 0603 [1608 Metric], 10%, X7R, CL Series Ceramic Capacitor,", Capacitance=4.7uF, Case Code (Imperial)=0603, Case Code (Metric)=1608, Dielectric=X7R, Manufacturer=Samsung, Max Operating Temperature=125°C, Min Operating Temperature=-55°C, Package Quantity=1, Supplier Part Number 1=1276-2087-1-ND, Tolerance=10%, Voltage Rating=6.3V, Case/Package=0603, Category="Ceramic Capacitors", ComponentLink1Description=https://datasheet.ciiva.com/25733/cl10b475kq8nqnc-25733762.pdf?src-supplier=Digi-Key, ComponentLink1URL=https://datasheet.ciiva.com/25733/cl10b475kq8nqnc-25733762.pdf?src-supplier=Digi-Key, Contact Plating=Tin, Depth=0.8mm, Height=0.8mm, Lead Free="Lead Free", Length=1.6mm, Manufacturer Part Number=CL10B475KQ8NQNC, Mount="Surface Mount", Packaging="Tape and Reel", Pricing 1="1=0.17000, 10=0.11800, 50=0.06720, 100=0.05560, 500=0.03898, 1000=0.03227 (USD)", RoHS=Yes, Stock 1=1537367, Supplier 1=Digi-Key, Termination=Wraparound, Thickness=0.035inch, Width=0.031inch
C8: library part C0603C104M4RACTU, "CAP 100NF 16V 0603", Capacitance=100nF, Case Code (Imperial)=0508, Case Code (Metric)=1220, Dielectric=X7R, Manufacturer=Murata, Manufacturer Part Number=LLL215R71C104MA11L, Max Operating Temperature=125°C, Min Operating Temperature=-55°C, Package Quantity=1, Supplier Part Number 1=399-1099-1-ND, Tolerance=20%, Voltage=16V, Case/Package=0508, Category="Ceramic Capacitors", ComponentLink1Description=https://datasheet.ciiva.com/17455/product-17455569.pdf?src-supplier=Avnet+Europe, ComponentLink1URL=https://datasheet.ciiva.com/17455/product-17455569.pdf?src-supplier=Avnet+Europe, ComponentLink2Description=https://datasheet.ciiva.com/11786/0900766b807a1cab-11786990.pdf?src-supplier=RSComponents, ComponentLink2URL=https://datasheet.ciiva.com/11786/0900766b807a1cab-11786990.pdf?src-supplier=RSComponents, ComponentLink3Description=https://datasheet.ciiva.com/139/partnumbering-e-01-139020.pdf?src-supplier=Digi-Key, ComponentLink3URL=https://datasheet.ciiva.com/139/partnumbering-e-01-139020.pdf?src-supplier=Digi-Key, ComponentLink4Description=https://datasheet.ciiva.com/139/partnumbering-e-01-139021.pdf?src-supplier=Digi-Key, ComponentLink4URL=https://datasheet.ciiva.com/139/partnumbering-e-01-139021.pdf?src-supplier=Digi-Key, ComponentLink5Description=https://datasheet.ciiva.com/139/partnumbering-e-01-139022.pdf?src-supplier=Digi-Key, ComponentLink5URL=https://datasheet.ciiva.com/139/partnumbering-e-01-139022.pdf?src-supplier=Digi-Key, Depth=2mm, Height=0.5mm, Lead Free="Lead Free", Length=1.25mm, Mount="Surface Mount", Packaging="Tape and Reel", Pricing 1="1=0.35000, 10=0.24500, 50=0.17160, 100=0.14700, 500=0.11026, 1000=0.09310 (USD)", Radiation Hardening=No, RoHS=Yes, Stock 1=4067, Supplier 1=Digi-Key, Termination=SMD/SMT, Thickness=0.02inch, Voltage Rating=16V, Voltage Rating (DC)=16V, Width=2mm
C10 C12 C13: library part 885012206076, "CAP CER 1UF 25V X7R 0603", Capacitance=1uF, Case/Package=1206, Dielectric=X7R, Manufacturer=Yageo, Manufacturer Part Number=CC1206MKX7R8BB105, Max Operating Temperature=125°C, Min Operating Temperature=-55°C, Supplier Part Number 1=732-7994-1-ND, Tolerance=20%, Voltage Rating=25V, Category="Ceramic Capacitors", ComponentLink1Description=https://datasheet.ciiva.com/13207/upy-gphc-x7r-6-3v-to-50v-8-12304-13207429.pdf?src-supplier=Mouser, ComponentLink1URL=https://datasheet.ciiva.com/13207/upy-gphc-x7r-6-3v-to-50v-8-12304-13207429.pdf?src-supplier=Mouser, Depth=1.6mm, Halogen Free="Halogen Free", Lead Free="Lead Free", Length=0.126inch, Mount="Surface Mount", Packaging="Tape and Reel", Pricing 1="1=0.26000, 10=0.17700, 50=0.10640, 100=0.08980, 500=0.06146, 1000=0.05437 (USD)", RoHS=Yes, Stock 1=18295, Supplier 1=Digi-Key, Thickness=0.049inch, Voltage Rating (DC)=25V, Width=0.063inch
C11: library part 885012206040, "CAP CER 10nF 16V X7R 0603", Capacitance=10nF, Case Code (Imperial)=0402, Case Code (Metric)=1005, Dielectric=X7R, Manufacturer=Yageo, Manufacturer Part Number=CC0402MRX7R7BB103, Max Operating Temperature=125°C, Min Operating Temperature=-55°C, Resistor Type=Ceramic, Supplier Part Number 1=732-7959-1-ND, Tolerance=20%, Voltage Rating=16V, Case/Package=0402, Category="Ceramic Capacitors", ComponentLink1Description=https://datasheet.ciiva.com/13264/upy-gphc-x7r-6-3v-to-50v-8-12304-13264234.pdf?src-supplier=Mouser, ComponentLink1URL=https://datasheet.ciiva.com/13264/upy-gphc-x7r-6-3v-to-50v-8-12304-13264234.pdf?src-supplier=Mouser, Depth=0.5mm, Halogen Free="Halogen Free", Lead Free="Lead Free", Length=0.039inch, Mount="Surface Mount", Number of Pins=2, Packaging="Tape and Reel", Pricing 1="1=0.10000, 10=0.01800, 50=0.00960, 100=0.00780, 500=0.00558, 1000=0.00439, 2500=0.00399, 5000=0.00367 (USD)", REACH SVHC="No SVHC", RoHS=Yes, Stock 1=33657, Supplier 1=Digi-Key, Termination=SMD/SMT, Thickness=0.022inch, Voltage Rating (DC)=16V, Weight=2.3E-05oz, Width=0.02inch
C16: library part C0805C330J5GACTU, "Cap Ceramic 33pF 50V C0G 5% SMD 0805 125C Paper T/R", Capacitance=33pF, Case Code (Imperial)=0805, Case Code (Metric)=2012, Dielectric=C0G, Dielectric Material=Ceramic, Manufacturer=KEMET, Max Operating Temperature=125°C, Min Operating Temperature=-55°C, Package Quantity=1, Supplier Part Number 1=399-1115-1-ND, Temperature Coefficient=30ppm/°C, Tolerance=5%, Voltage=50V, Case/Package=0805, Category="Ceramic Capacitors", ComponentLink1Description=https://datasheet.ciiva.com/144/docfinderpartnumber-c0805c330j5gactu-144613.pdf?src-supplier=Digi-Key, ComponentLink1URL=https://datasheet.ciiva.com/144/docfinderpartnumber-c0805c330j5gactu-144613.pdf?src-supplier=Digi-Key, ComponentLink2Description=https://datasheet.ciiva.com/18193/getdatasheetpartid-116050-18193733.pdf?src-supplier=Verical, ComponentLink2URL=https://datasheet.ciiva.com/18193/getdatasheetpartid-116050-18193733.pdf?src-supplier=Verical, ComponentLink3Description=https://datasheet.ciiva.com/28668/1789732-28668774.pdf?src-supplier=Element14, ComponentLink3URL=https://datasheet.ciiva.com/28668/1789732-28668774.pdf?src-supplier=Element14, Contact Material=Tin, Contact Plating=Tin,Matte, Depth=1.25mm, Dissipation Factor=0.5%, Height=0.78mm, Lead Free="Lead Free", Lead Pitch=0.75mm, Length=2mm, Manufacturer Part Number=C0805C330J5GACTU, Mount="Surface Mount", Packaging="Tape and Reel", Pricing 1="1=0.10000, 10=0.06700, 50=0.03640, 100=0.02960, 500=0.02118, 1000=0.01664 (USD)", Radiation Hardening=No, REACH SVHC="No SVHC", RoHS=Yes, Stock 1=198081, Supplier 1=Digi-Key, Termination=SMD/SMT, Thickness=0.035inch, Voltage Rating=50V, Voltage Rating (DC)=50V, Width=1.2mm
C18: library part GRM21BR61E106KA73K, "CAP CER 10UF 25V X5R 0805", Capacitance=10uF, Case/Package=0805, Dielectric=X5R, Manufacturer=Murata, Max Operating Temperature=85°C, Min Operating Temperature=-55°C, Package Quantity=10000, Supplier Part Number 1=490-16824-1-ND, Tolerance=10%, Voltage Rating=25V, Category="Ceramic Capacitors", ComponentLink1Description=http://www.mouser.com/ds/2/281/c02e-2905.pdf?src-supplier=Mouser, ComponentLink1URL=http://www.mouser.com/ds/2/281/c02e-2905.pdf?src-supplier=Mouser, ComponentLink2Description=http://search.murata.co.jp/Ceramy/image/img/A01X/G101/ENG/GRM21BR61E106KA73-01.pdf?src-supplier=Digi-Key, ComponentLink2URL=http://search.murata.co.jp/Ceramy/image/img/A01X/G101/ENG/GRM21BR61E106KA73-01.pdf?src-supplier=Digi-Key, ComponentLink3Description=https://search.murata.co.jp/Ceramy/image/img/A01X/G101/ENG/GRM21BR61E106KA73-01.pdf?src-supplier=Digi-Key, ComponentLink3URL=https://search.murata.co.jp/Ceramy/image/img/A01X/G101/ENG/GRM21BR61E106KA73-01.pdf?src-supplier=Digi-Key, Length=0.079inch, Manufacturer Part Number=GRM21BR61E106KA73K, Mount="Surface Mount", Packaging="Tape and Reel", Pricing 1="1=0.25000, 10=0.17200, 50=0.10340, 100=0.08740, 500=0.05978, 1000=0.05288, 2500=0.05058, 5000=0.04598 (USD)", RoHS=Yes, Stock 1=51226, Supplier 1=Digi-Key, Thickness=0.055inch, Voltage Rating (DC)=25V, Weight=0.000335oz, Width=0.049inch
C19 C21: library part GRM21BR61C106KE15L, "CAP CER 10UF 16V X5R 0805", Capacitance=10uF, Case Code (Imperial)=0805, Case Code (Metric)=2012, Dielectric=X5R, Manufacturer=Murata, Max Operating Temperature=85°C, Min Operating Temperature=-55°C, Package Quantity=1, Supplier Part Number 1=490-3886-1-ND, Tolerance=10%, Voltage=16V, Case/Package=0805, Category="Ceramic Capacitors", ComponentLink1Description=https://datasheet.ciiva.com/2989/product-2989696.pdf?src-supplier=Avnet, ComponentLink1URL=https://datasheet.ciiva.com/2989/product-2989696.pdf?src-supplier=Avnet, ComponentLink2Description=https://datasheet.ciiva.com/7719/1747468-7719090.pdf?src-supplier=Element14, ComponentLink2URL=https://datasheet.ciiva.com/7719/1747468-7719090.pdf?src-supplier=Element14, ComponentLink3Description=https://datasheet.ciiva.com/23628/460993-23628598.pdf?src-supplier=Newark, ComponentLink3URL=https://datasheet.ciiva.com/23628/460993-23628598.pdf?src-supplier=Newark, ComponentLink4Description=https://datasheet.ciiva.com/3777/1956grm21br61c106ke1523-3777137.pdf?src-supplier=Arrow+Electronics, ComponentLink4URL=https://datasheet.ciiva.com/3777/1956grm21br61c106ke1523-3777137.pdf?src-supplier=Arrow+Electronics, ComponentLink5Description=https://datasheet.ciiva.com/29202/450891-da-01-de-vs-chip-kond-0805-10-0-uf-10pr-16-0v-x5r-29202696.pdf?src-supplier=Conrad, ComponentLink5URL=https://datasheet.ciiva.com/29202/450891-da-01-de-vs-chip-kond-0805-10-0-uf-10pr-16-0v-x5r-29202696.pdf?src-supplier=Conrad, ComponentLink6Description=https://datasheet.ciiva.com/29199/454607-da-01-en-vs-kondensator-0805-29199611.pdf?src-supplier=Conrad, ComponentLink6URL=https://datasheet.ciiva.com/29199/454607-da-01-en-vs-kondensator-0805-29199611.pdf?src-supplier=Conrad, ComponentLink7Description=https://datasheet.ciiva.com/2989/product-2989697.pdf?src-supplier=Avnet, ComponentLink7URL=https://datasheet.ciiva.com/2989/product-2989697.pdf?src-supplier=Avnet, ComponentLink8Description=https://datasheet.ciiva.com/137/partnumbering-e-01-137917.pdf?src-supplier=Digi-Key, ComponentLink8URL=https://datasheet.ciiva.com/137/partnumbering-e-01-137917.pdf?src-supplier=Digi-Key, ComponentLink9Description=https://datasheet.ciiva.com/137/partnumbering-e-01-137918.pdf?src-supplier=Digi-Key, ComponentLink9URL=https://datasheet.ciiva.com/137/partnumbering-e-01-137918.pdf?src-supplier=Digi-Key, ComponentLink10Description=https://datasheet.ciiva.com/137/partnumbering-e-01-137919.pdf?src-supplier=Digi-Key, ComponentLink10URL=https://datasheet.ciiva.com/137/partnumbering-e-01-137919.pdf?src-supplier=Digi-Key, Depth=1.25mm, Height=1.25mm, Lead Free="Lead Free", Length=2mm, Manufacturer Part Number=GRM21BR61C106KE15L, Material=Ceramic, Mount="Surface Mount", Packaging="Tape and Reel", Pricing 1="1=0.30000, 10=0.20600, 50=0.13740, 100=0.11680, 500=0.08244, 1000=0.07214 (USD)", Radiation Hardening=No, REACH SVHC="No SVHC", RoHS=Yes, Stock 1=1102233, Supplier 1=Digi-Key, Termination=SMD/SMT, Thickness=0.053inch, Voltage Rating=16V, Voltage Rating (DC)=16V, Width=1.25mm
C20: library part CC0805KRX7R7BB104, "YAGEO - CC0805KRX7R7BB104 - SMD Multilayer Ceramic Capacitor, 0.1 µF, 16 V, 0805 [2012 Metric], ± 10%, X7R, CC Series", Capacitance=100nF, Case Code (Imperial)=0805, Case Code (Metric)=2012, Dielectric=X7R, Insulation Resistance=100GR, Manufacturer=Yageo, Max Operating Temperature=125°C, Min Operating Temperature=-55°C, Package Quantity=1, Resistor Type=Ceramic, Supplier Part Number 1=311-1142-1-ND, Tolerance=10%, Voltage=16V, Case/Package=0805, Category="Ceramic Capacitors", ComponentLink1Description=https://datasheet.ciiva.com/8034/1784427-8034017.pdf?src-supplier=Element14, ComponentLink1URL=https://datasheet.ciiva.com/8034/1784427-8034017.pdf?src-supplier=Element14, ComponentLink2Description=https://datasheet.ciiva.com/11786/0900766b80d84f1d-11786102.pdf?src-supplier=RSComponents, ComponentLink2URL=https://datasheet.ciiva.com/11786/0900766b80d84f1d-11786102.pdf?src-supplier=RSComponents, ComponentLink3Description=https://datasheet.ciiva.com/15189/getdatasheetpartid-314877-15189221.pdf?src-supplier=Verical, ComponentLink3URL=https://datasheet.ciiva.com/15189/getdatasheetpartid-314877-15189221.pdf?src-supplier=Verical, ComponentLink4Description=https://datasheet.ciiva.com/144/mlccorderingcode-144998.pdf?src-supplier=Digi-Key, ComponentLink4URL=https://datasheet.ciiva.com/144/mlccorderingcode-144998.pdf?src-supplier=Digi-Key, ComponentLink5Description=https://datasheet.ciiva.com/144/mlccorderingcode-144999.pdf?src-supplier=Digi-Key, ComponentLink5URL=https://datasheet.ciiva.com/144/mlccorderingcode-144999.pdf?src-supplier=Digi-Key, ComponentLink6Description=https://datasheet.ciiva.com/145/mlccorderingcode-145000.pdf?src-supplier=Digi-Key, ComponentLink6URL=https://datasheet.ciiva.com/145/mlccorderingcode-145000.pdf?src-supplier=Digi-Key, ComponentLink7Description=https://datasheet.ciiva.com/11465/upy-gphc-x7r-6-3v-to-50v-8-11465289.pdf?src-supplier=Avnet, ComponentLink7URL=https://datasheet.ciiva.com/11465/upy-gphc-x7r-6-3v-to-50v-8-11465289.pdf?src-supplier=Avnet, ComponentLink8Description=https://datasheet.ciiva.com/17436/upy-gphc-x7r-6-3v-to-50v-8-17436617.pdf?src-supplier=Avnet+Europe, ComponentLink8URL=https://datasheet.ciiva.com/17436/upy-gphc-x7r-6-3v-to-50v-8-17436617.pdf?src-supplier=Avnet+Europe, ComponentLink9Description=https://datasheet.ciiva.com/7978/1489800-7978204.pdf?src-supplier=Element14, ComponentLink9URL=https://datasheet.ciiva.com/7978/1489800-7978204.pdf?src-supplier=Element14, ComponentLink10Description=https://datasheet.ciiva.com/8034/1784427-8034015.pdf?src-supplier=Element14, ComponentLink10URL=https://datasheet.ciiva.com/8034/1784427-8034015.pdf?src-supplier=Element14, Depth=1.25mm, Halogen Free="Halogen Free", Height=0.85mm, Lead Free="Lead Free", Length=2mm, Manufacturer Part Number=CC0805KRX7R7BB104, Mount="Surface Mount", Number of Pins=2, Packaging="Tape and Reel", Pricing 1="1=0.12000, 10=0.08500, 50=0.04820, 100=0.03990, 500=0.02794, 1000=0.02314 (USD)", Radiation Hardening=No, REACH SVHC="No SVHC", RoHS=Yes, Stock 1=224110, Supplier 1=Digi-Key, Termination=SMD/SMT, Thickness=0.033inch, Voltage Rating=16V, Voltage Rating (DC)=16V, Width=0.049inch
C22: library part 0805ZD105KAT2A, "CAP CER 1UF 10V X5R 0805", Capacitance=1uF, Case Code (Imperial)=0805, Case Code (Metric)=2012, Dielectric=X5R, Manufacturer="Kyocera AVX", Max Operating Temperature=85°C, Min Operating Temperature=-55°C, Package Quantity=2000, Supplier Part Number 1=478-1412-1-ND, Tolerance=10%, Voltage Rating=10V, Case/Package=0805, Category="Ceramic Capacitors", ComponentLink1Description=https://datasheet.ciiva.com/19467/1037155-19467690.pdf?src-supplier=Jameco, ComponentLink1URL=https://datasheet.ciiva.com/19467/1037155-19467690.pdf?src-supplier=Jameco, ComponentLink2Description=https://datasheet.ciiva.com/152/cx5r-152610.pdf?src-supplier=Digi-Key, ComponentLink2URL=https://datasheet.ciiva.com/152/cx5r-152610.pdf?src-supplier=Digi-Key, ComponentLink3Description=https://datasheet.ciiva.com/152/cx5r-152611.pdf?src-supplier=Digi-Key, ComponentLink3URL=https://datasheet.ciiva.com/152/cx5r-152611.pdf?src-supplier=Digi-Key, ComponentLink4Description=https://datasheet.ciiva.com/152/cx5r-152612.pdf?src-supplier=Digi-Key, ComponentLink4URL=https://datasheet.ciiva.com/152/cx5r-152612.pdf?src-supplier=Digi-Key, ComponentLink5Description=https://datasheet.ciiva.com/5424/cx5r-33896-5424501.pdf?src-supplier=Mouser, ComponentLink5URL=https://datasheet.ciiva.com/5424/cx5r-33896-5424501.pdf?src-supplier=Mouser, ComponentLink6Description=https://datasheet.ciiva.com/28586/1666675-28586229.pdf?src-supplier=Element14, ComponentLink6URL=https://datasheet.ciiva.com/28586/1666675-28586229.pdf?src-supplier=Element14, ComponentLink7Description=https://datasheet.ciiva.com/28586/1666675-28586885.pdf?src-supplier=Element14, ComponentLink7URL=https://datasheet.ciiva.com/28586/1666675-28586885.pdf?src-supplier=Element14, ComponentLink8Description=https://datasheet.ciiva.com/2988/cx5r-2988073.pdf?src-supplier=Avnet, ComponentLink8URL=https://datasheet.ciiva.com/2988/cx5r-2988073.pdf?src-supplier=Avnet, ComponentLink9Description=https://datasheet.ciiva.com/2988/cx5r-2988074.pdf?src-supplier=Avnet, ComponentLink9URL=https://datasheet.ciiva.com/2988/cx5r-2988074.pdf?src-supplier=Avnet, ComponentLink10Description=https://datasheet.ciiva.com/17494/cx5r-17494091.pdf?src-supplier=Avnet+Europe, ComponentLink10URL=https://datasheet.ciiva.com/17494/cx5r-17494091.pdf?src-supplier=Avnet+Europe, Depth=1.25mm, Height=1.4mm, Lead Free="Lead Free", Length=2.01mm, Manufacturer Part Number=0805ZD105KAT2A, Mount="Surface Mount", Number of Pins=2, Packaging="Tape and Reel", Pricing 1="1=0.19000, 10=0.13200, 50=0.07920, 100=0.06690, 500=0.04576, 1000=0.04048 (USD)", Radiation Hardening=No, REACH SVHC="No SVHC", RoHS=Yes, Stock 1=2747, Supplier 1=Digi-Key, Termination=SMD/SMT, Thickness=0.055inch, Voltage Rating (DC)=10V, Width=0.049inch
C23: library part 885012107001, "CAP CER 2.2UF 6.3V X5R 0805", Capacitance=2.2uF, Case Code (Imperial)=0805, Case Code (Metric)=2012, Manufacturer="Wurth Electronics", Max Operating Temperature=85°C, Min Operating Temperature=-55°C, Supplier Part Number 1=732-7612-1-ND, Tolerance=20%, Voltage Rating=6.3V, Case/Package=0805, Category="Ceramic Capacitors", ComponentLink1Description=http://www.farnell.com/datasheets/2546749.pdf?src-supplier=Farnell, ComponentLink1URL=http://www.farnell.com/datasheets/2546749.pdf?src-supplier=Farnell, ComponentLink2Description=https://katalog.we-online.de/pbs/datasheet/885012107001.pdf?src-supplier=Digi-Key, ComponentLink2URL=https://katalog.we-online.de/pbs/datasheet/885012107001.pdf?src-supplier=Digi-Key, Length=0.079inch, Manufacturer Part Number=885012107001, Mount="Surface Mount", Packaging="Tape and Reel", Pricing 1="1=0.14000, 10=0.12700, 100=0.11380, 500=0.10068 (USD)", RoHS=Yes, Stock 1=2091, Supplier 1=Digi-Key, Thickness=0.053inch, Width=0.049inch
C24: library part C0805C331K5GACTU, "CAP CER 330PF 50V C0G/NP0 0805", Capacitance=330pF, Case Code (Imperial)=0603, Case Code (Metric)=1608, Dielectric=C0G, Dielectric Material=Ceramic, Manufacturer=KEMET, Manufacturer Part Number=C0603C331K5GACTU, Max Operating Temperature=125°C, Min Operating Temperature=-55°C, Package Quantity=1, Supplier Part Number 1=399-8065-1-ND, Tolerance=10%, Voltage Rating=50V, Case/Package=0603, Category="Ceramic Capacitors", ComponentLink1Description=http://www.farnell.com/datasheets/2747228.pdf?src-supplier=Farnell, ComponentLink1URL=http://www.farnell.com/datasheets/2747228.pdf?src-supplier=Farnell, ComponentLink2Description=http://www.mouser.com/ds/2/212/KEM_C1003_C0G_SMD-1101588.pdf?src-supplier=Mouser, ComponentLink2URL=http://www.mouser.com/ds/2/212/KEM_C1003_C0G_SMD-1101588.pdf?src-supplier=Mouser, ComponentLink3Description=http://components.arrow.com/part/dataview/0323_00322851?src-supplier=Arrow+Europe, ComponentLink3URL=http://components.arrow.com/part/dataview/0323_00322851?src-supplier=Arrow+Europe, ComponentLink4Description=http://components.arrow.com/part/dataview/2088957S3071164N7429?src-supplier=Arrow+Electronics, ComponentLink4URL=http://components.arrow.com/part/dataview/2088957S3071164N7429?src-supplier=Arrow+Electronics, ComponentLink5Description=http://www.farnell.com/datasheets/2747228.pdf?src-supplier=Element14, ComponentLink5URL=http://www.farnell.com/datasheets/2747228.pdf?src-supplier=Element14, ComponentLink6Description=http://www.farnell.com/datasheets/2747228.pdf?src-supplier=Newark, ComponentLink6URL=http://www.farnell.com/datasheets/2747228.pdf?src-supplier=Newark, ComponentLink7Description=http://capacitoredge.kemet.com/capedge2/DataSheet?pn=C0603C331K5GACTU&src-supplier=Avnet+Europe, ComponentLink7URL=http://capacitoredge.kemet.com/capedge2/DataSheet?pn=C0603C331K5GACTU&src-supplier=Avnet+Europe, ComponentLink8Description=https://search.kemet.com/component-edge/download/datasheet/C0603C331K5GACTU.pdf?src-supplier=Digi-Key, ComponentLink8URL=https://search.kemet.com/component-edge/download/datasheet/C0603C331K5GACTU.pdf?src-supplier=Digi-Key, ComponentLink9Description=http://capacitoredge.kemet.com/capedge2/DataSheet?pn=C0603C331K5GACTU&src-supplier=Avnet, ComponentLink9URL=http://capacitoredge.kemet.com/capedge2/DataSheet?pn=C0603C331K5GACTU&src-supplier=Avnet, Depth=0.8mm, Dissipation Factor=0.1%, Height=0.8mm, Lead Free="Lead Free", Lead Pitch=0.7mm, Length=1.6mm, Mount="Surface Mount", Packaging="Tape and Reel", Pricing 1="1=0.31000, 10=0.21500, 50=0.14300, 100=0.12160, 500=0.08580, 1000=0.07508 (USD)", Radiation Hardening=No, RoHS=Yes, Stock 1=8890, Supplier 1=Digi-Key, Termination=SMD/SMT, Thickness=0.034inch, Voltage Rating (DC)=50V, Width=0.8mm
C25: library part C0805C226K7PAC7800, "CAP CER 22UF 4V X5R 0805", Capacitance=22uF, Case Code (Imperial)=0805, Case Code (Metric)=2012, Manufacturer=KEMET, Max Operating Temperature=85°C, Min Operating Temperature=-55°C, Supplier Part Number 1=399-15033-1-ND, Tolerance=10%, Voltage Rating=4V, Case/Package=0805, Category="Ceramic Capacitors", ComponentLink1Description=https://api.kemet.com/component-edge/download/datasheet/C0805C226K7PAC7800.pdf?src-supplier=Digi-Key, ComponentLink1URL=https://api.kemet.com/component-edge/download/datasheet/C0805C226K7PAC7800.pdf?src-supplier=Digi-Key, Manufacturer Part Number=C0805C226K7PAC7800, Mount="Surface Mount", Packaging="Tape and Reel", Pricing 1="1=0.63000, 10=0.44600, 50=0.33700, 100=0.29340, 500=0.21736, 1000=0.18476 (USD)", RoHS=No, Stock 1=13449, Supplier 1=Digi-Key
C26: library part C0805C103J3GACTU, "0805 C 0.1µF Ceramic Multilayer Capacitor; 25 VDC; +125degC; C0G Dielec; +/-5%", Capacitance=39pF, Case/Package=0805, Dielectric=C0G, Dielectric Material=Ceramic, Manufacturer=KEMET, Manufacturer Part Number=C0805C390J5GACTU, Max Operating Temperature=125°C, Min Operating Temperature=-55°C, Supplier Part Number 1=490-12752-1-ND, Tolerance=5%, Voltage Rating (DC)=50V, Category="Ceramic Capacitors", ComponentLink1Description=https://datasheet.ciiva.com/26948/getdatasheetpartid-773240-26948493.pdf?src-supplier=Verical, ComponentLink1URL=https://datasheet.ciiva.com/26948/getdatasheetpartid-773240-26948493.pdf?src-supplier=Verical, ComponentLink2Description=https://datasheet.ciiva.com/7842/1372242-7842601.pdf?src-supplier=Element14, ComponentLink2URL=https://datasheet.ciiva.com/7842/1372242-7842601.pdf?src-supplier=Element14, ComponentLink3Description=https://datasheet.ciiva.com/46393/1791934-46393321.pdf?src-supplier=Element14, ComponentLink3URL=https://datasheet.ciiva.com/46393/1791934-46393321.pdf?src-supplier=Element14, ComponentLink4Description=https://datasheet.ciiva.com/5419/kem-c1003-c0g-smd-356956-5419471.pdf?src-supplier=Mouser, ComponentLink4URL=https://datasheet.ciiva.com/5419/kem-c1003-c0g-smd-356956-5419471.pdf?src-supplier=Mouser, Depth=1.25mm, Height=0.78mm, Lead Free="Lead Free", Length=2mm, Mount="Surface Mount", Packaging="Tape and Reel", Pricing 1="1=0.10000, 10=0.07600, 50=0.04160, 100=0.03400, 500=0.02426, 1000=0.01906 (USD)", Radiation Hardening=No, RoHS=Yes, Stock 1=19514, Supplier 1=Digi-Key, Supplier 2=Digi-Key, Supplier Part Number 2=399-7990-1-ND
C28 C29: library part CC0805KKX5R5BB105, "CAP CER 1UF 6.3V X5R 0805", Capacitance=1uF, Case/Package=0805, Dielectric=X5R, Manufacturer=Yageo, Max Operating Temperature=85°C, Min Operating Temperature=-55°C, Supplier Part Number 1=311-3417-1-ND, Tolerance=10%, Voltage Rating=6.3V, Category="Ceramic Capacitors", ComponentLink1Description=http://www.yageo.com/documents/recent/UPY-GPHC_X5R_4V-to-50V_25.pdf?src-supplier=Digi-Key, ComponentLink1URL=http://www.yageo.com/documents/recent/UPY-GPHC_X5R_4V-to-50V_25.pdf?src-supplier=Digi-Key, ComponentLink2Description=http://www.yageo.com/documents/recent/UPY-GPHC_X5R_4V-to-50V_23.pdf?src-supplier=Digi-Key, ComponentLink2URL=http://www.yageo.com/documents/recent/UPY-GPHC_X5R_4V-to-50V_23.pdf?src-supplier=Digi-Key, Halogen Free="Halogen Free", Lead Free="Lead Free", Length=0.079inch, Manufacturer Part Number=CC0805KKX5R5BB105, Mount="Surface Mount", Packaging="Tape and Reel", Pricing 1="1=0.19000, 10=0.12900, 50=0.07740, 100=0.06540, 500=0.04474, 1000=0.03957 (USD)", RoHS=Yes, Stock 1=1698, Supplier 1=Digi-Key, Thickness=0.057inch, Voltage Rating (DC)=6.3V, Width=0.049inch